# Altium PCB test.PcbDoc
Units mm, origin at the board's own origin, x right, y up, seen from the top; angles counter-clockwise.
Board outline 81.15 x 81.79 mm, 2 copper layers (Top Layer, Bottom Layer); 14 components, 10 nets, 66 pads, 1 vias.
Unrouted connection lines stored in the file: 1.
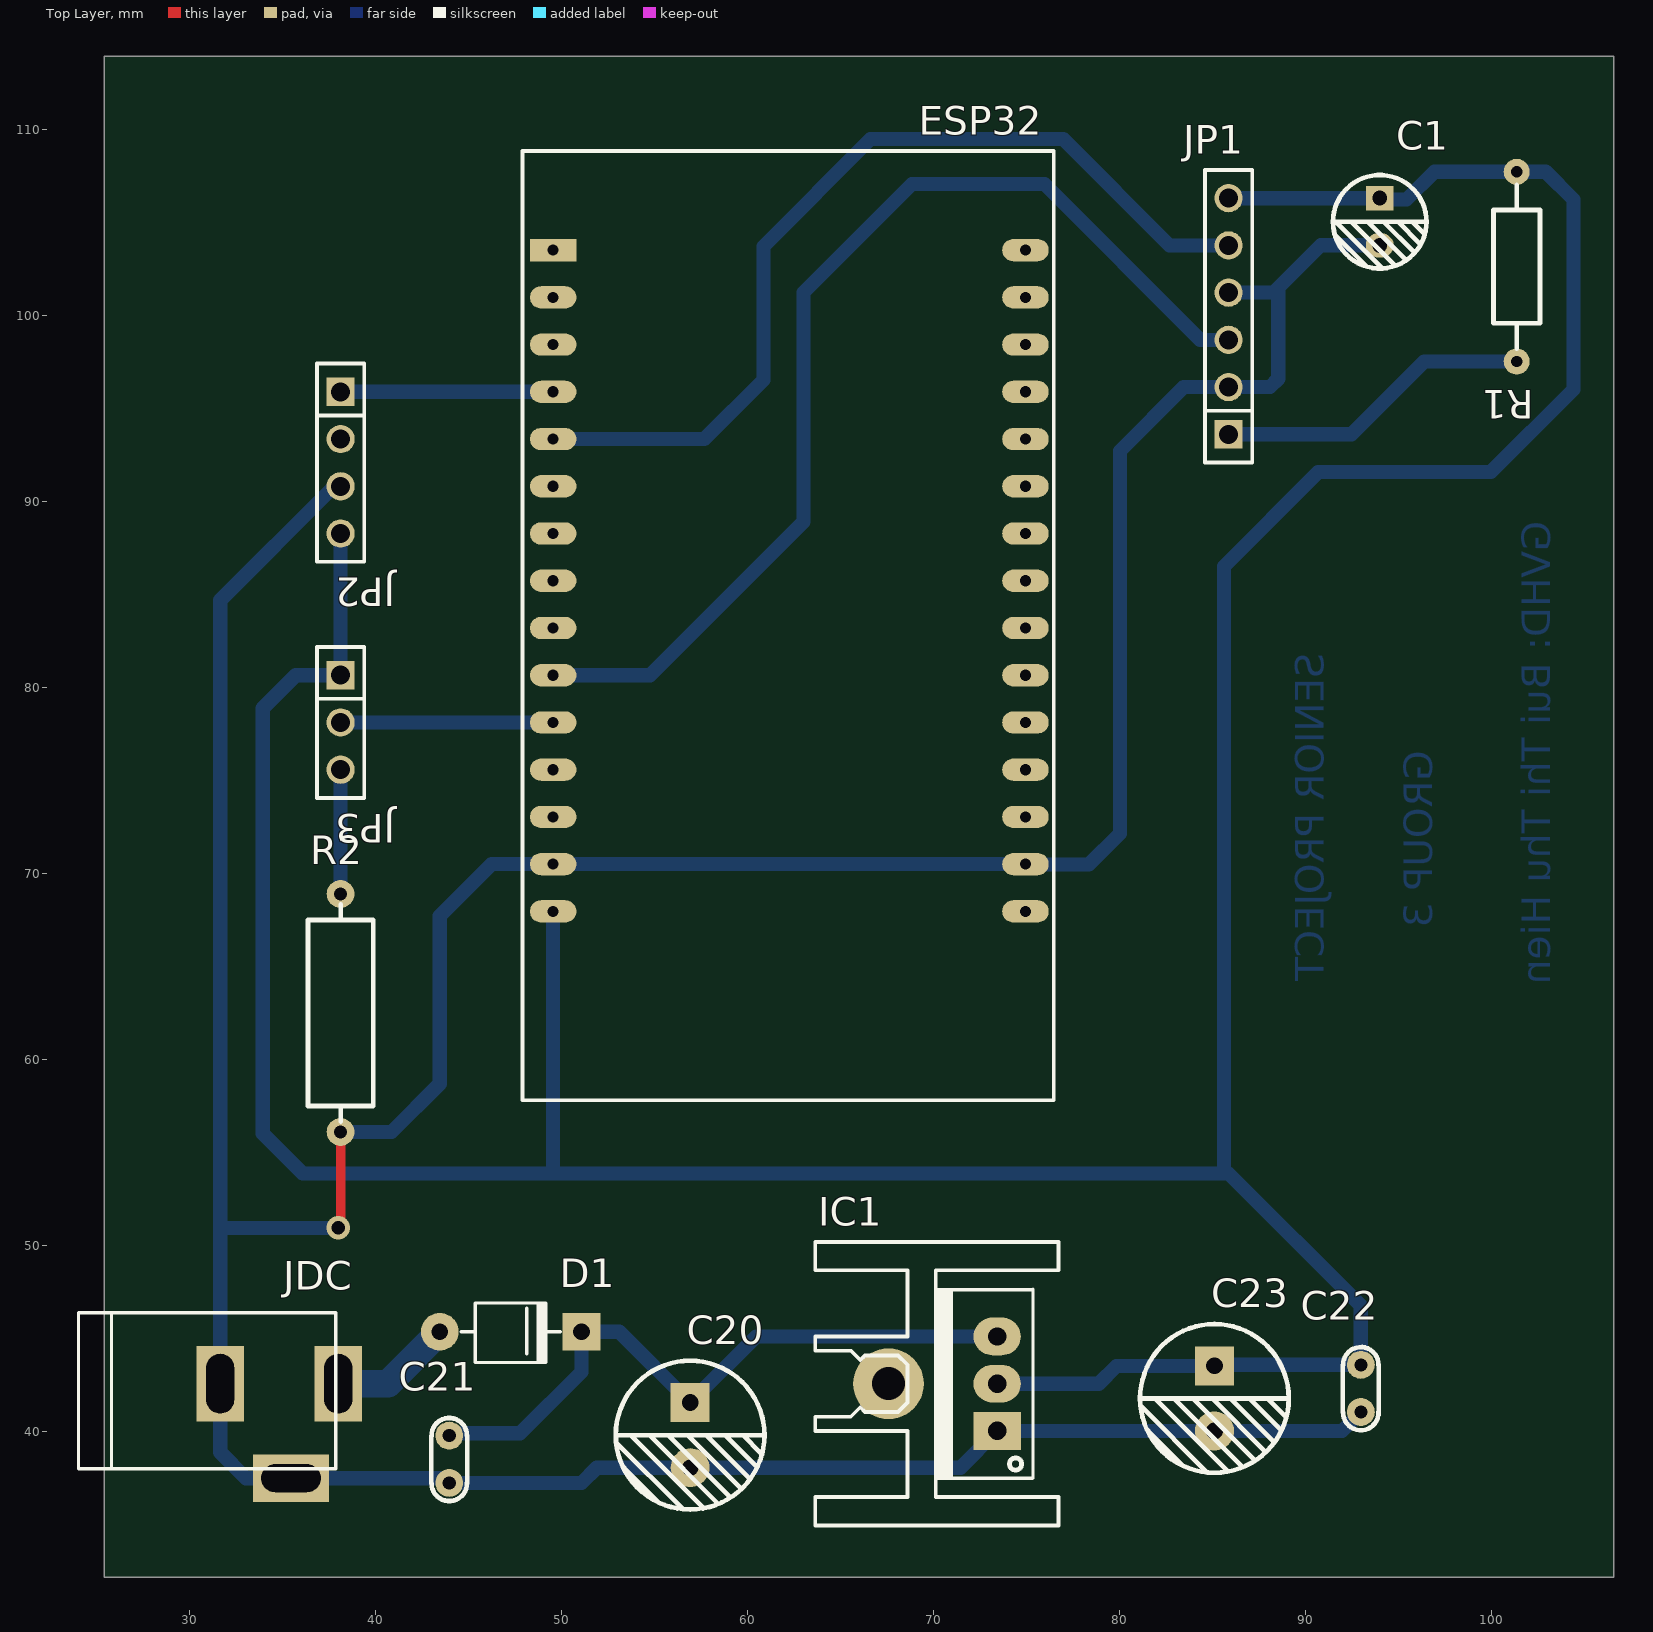
[diagram p0: Top Layer view]
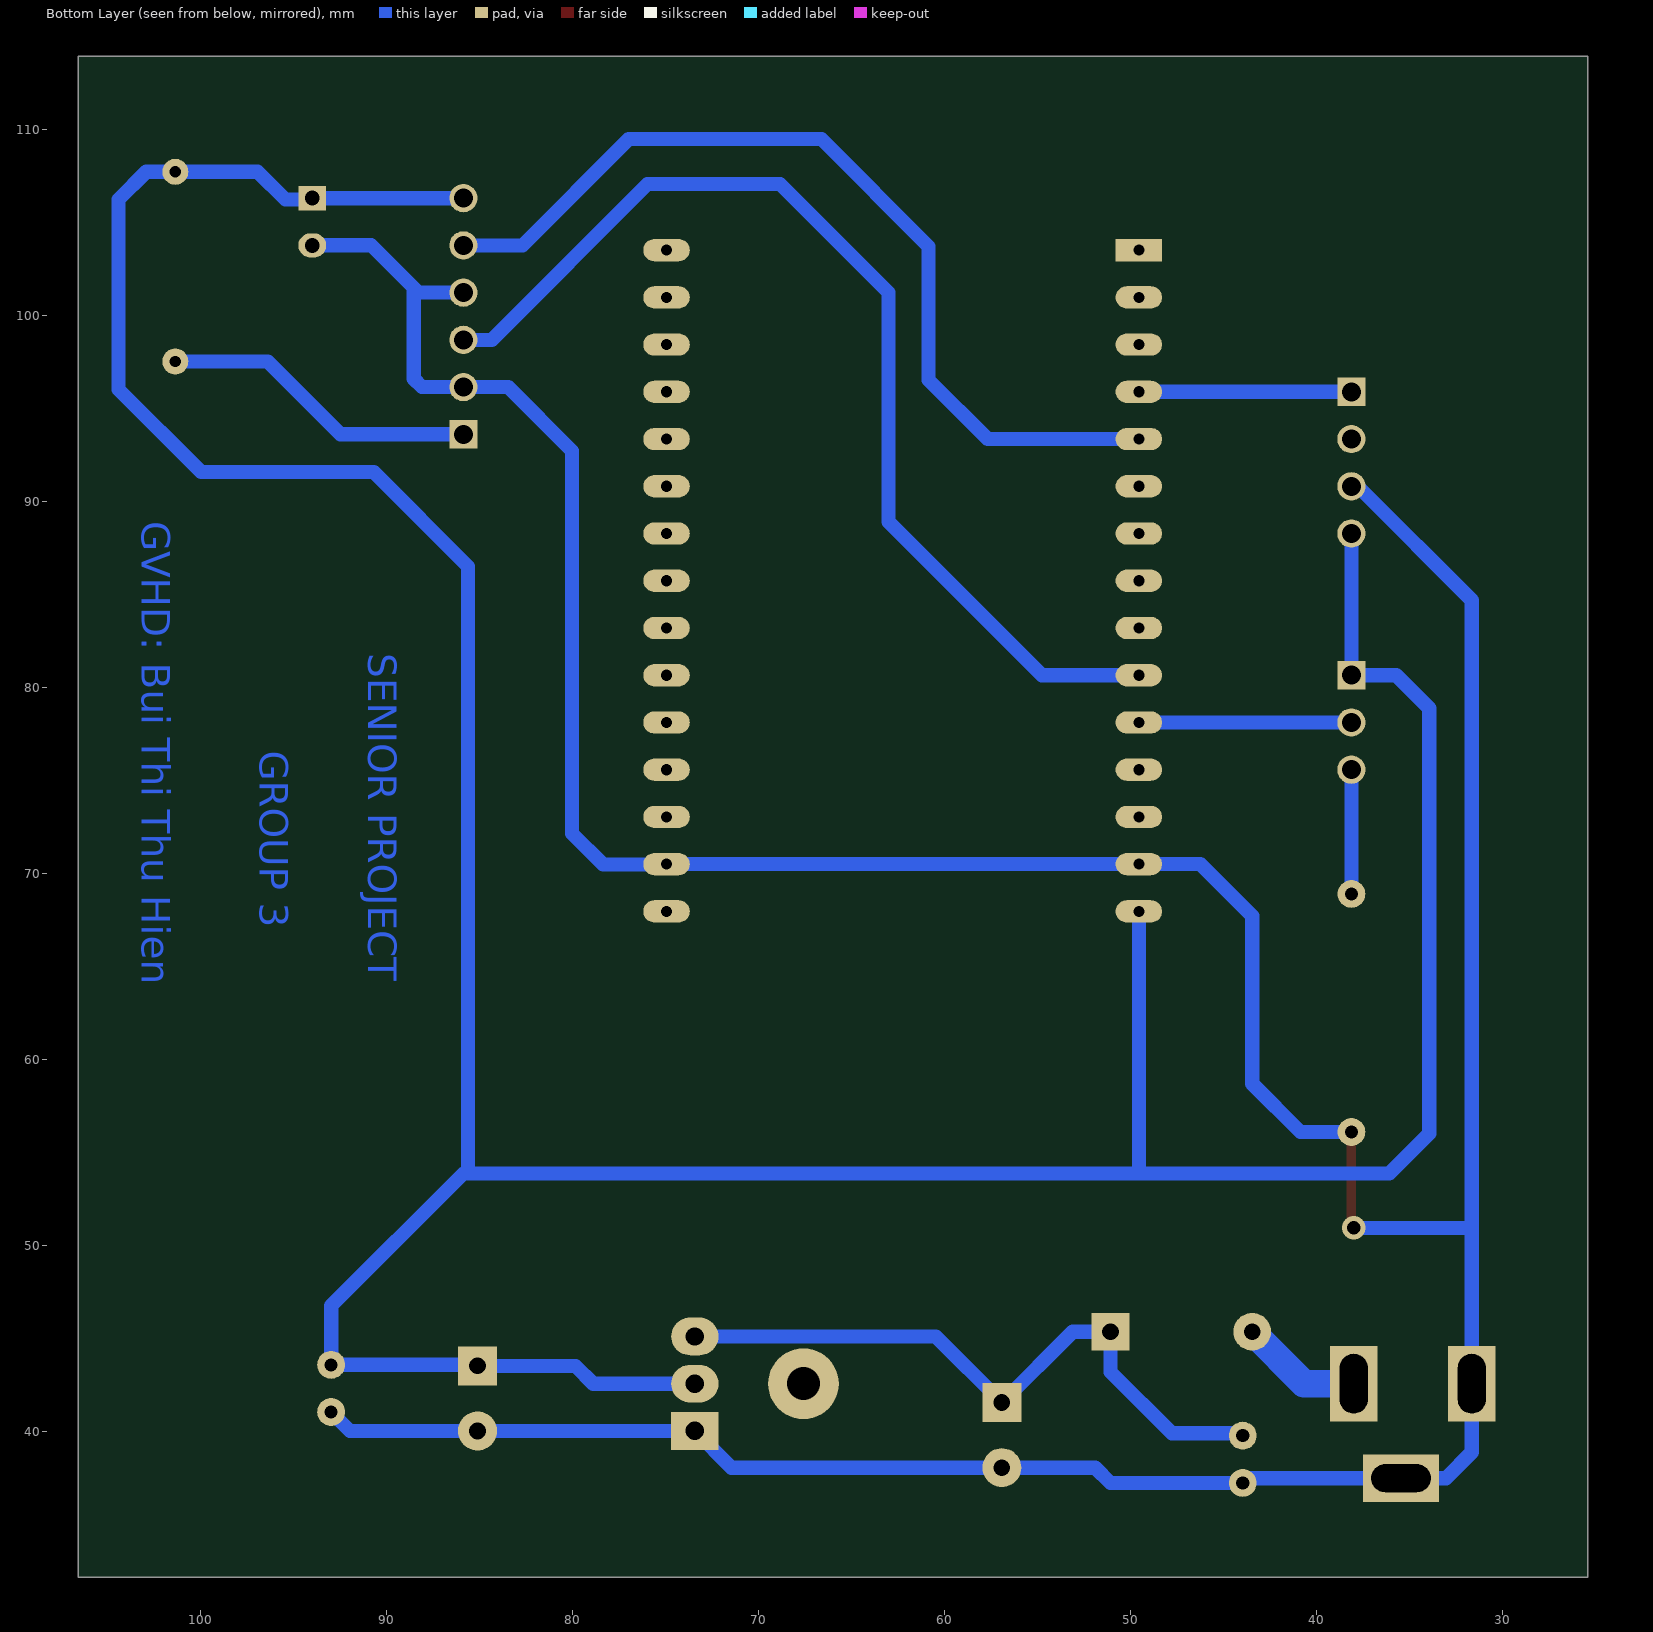
[diagram p1: Bottom Layer view, seen from below]
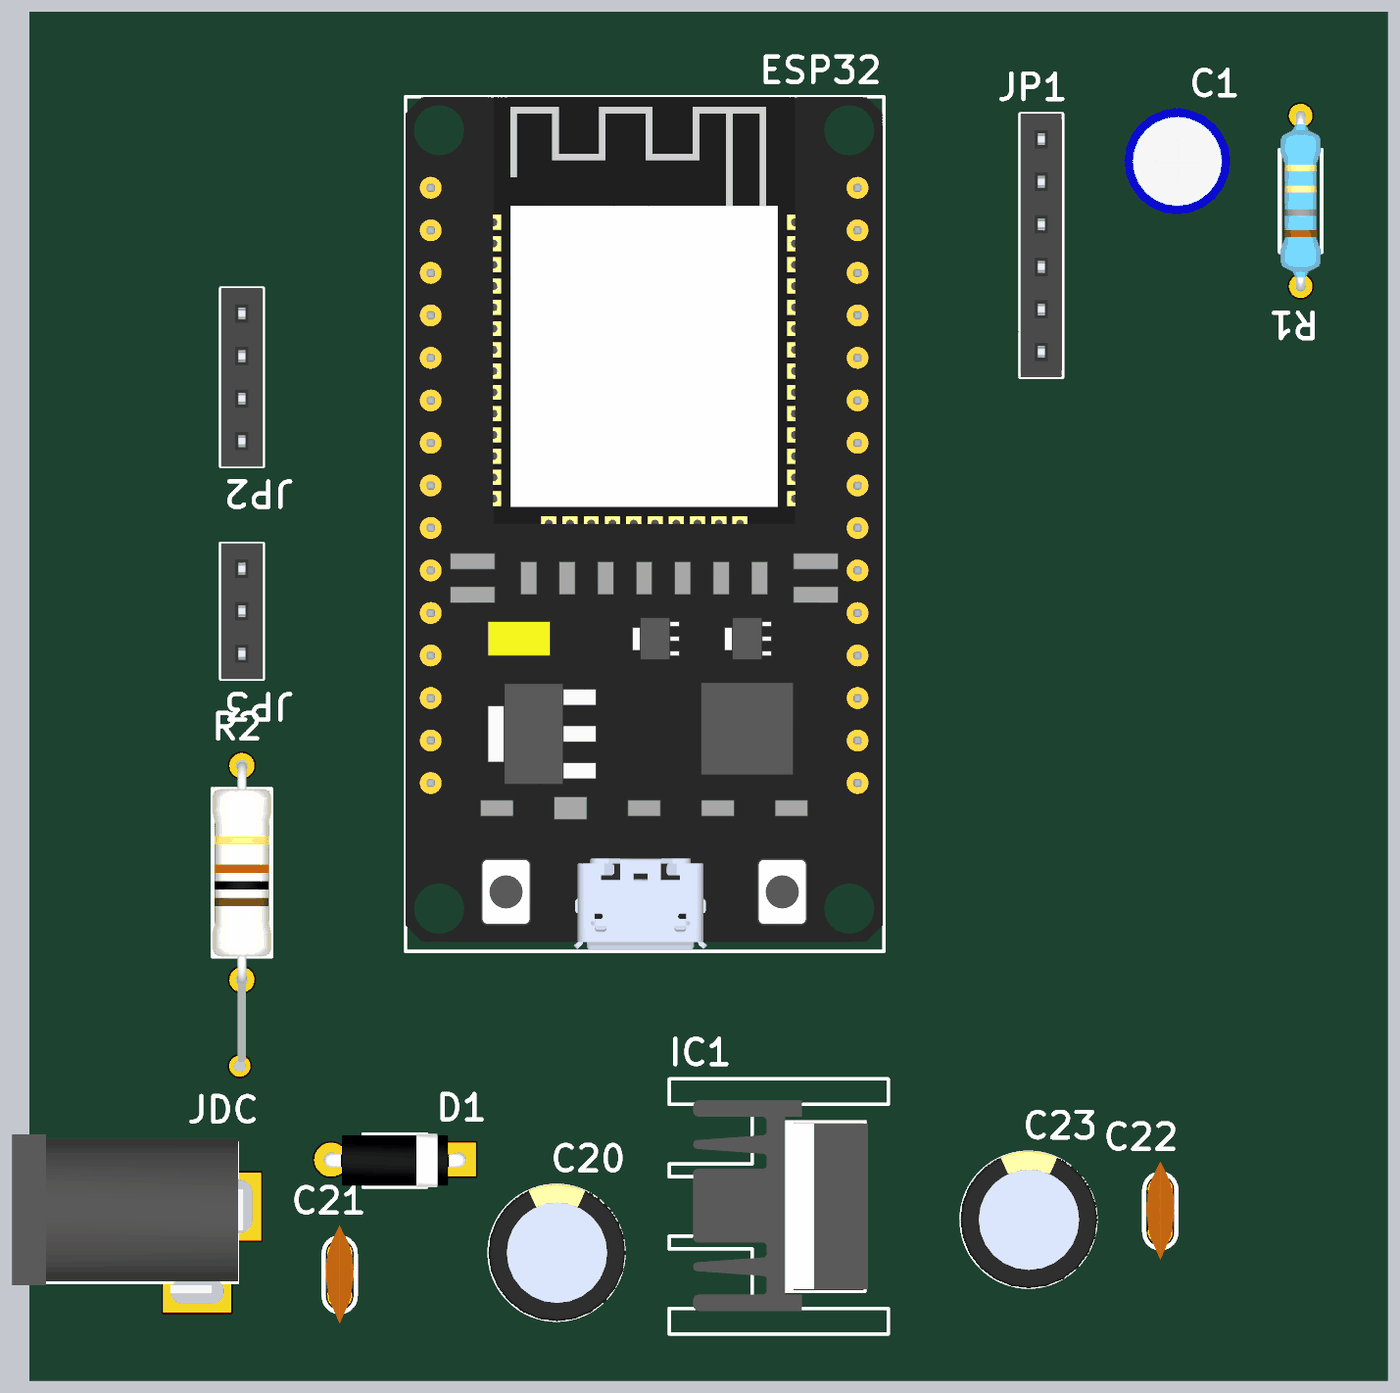
[diagram p2: 3D render of the assembled board from above, using the file's embedded part models]

## Layer stack, top to bottom
Top Solder: solder mask 0.0102, Solder Resist, Dk 3.5
Top Layer: signal copper 0.0356
Dielectric 1: dielectric 0.32, FR-4, Dk 4.8
Bottom Layer: signal copper 0.0356
Bottom Solder: solder mask 0.0102, Solder Resist, Dk 3.5

## Board outline
25.4,32.131 106.553,32.131 106.553,113.919 25.4,113.919

## Design rules (kind name [scope] priority, off if disabled: settings)
Clearance [All] p1: gap=0.9 ignorepadtopadclearanceinfootprint=FALSE
PolygonConnect [All] p1: connectstyle=Relief reliefconductorwidth=0.254 reliefentries=4 polygonreliefangle="90 Angle" airgapwidth=0.254
RoutingLayers [All] p1: top layer_v5=FALSE bottom layer_v5=TRUE
RoutingVias [All] p1: holewidth=0.711 width=1.27 viastyle="Through Hole" minholewidth=0.711 minwidth=1.27 maxholewidth=0.711 maxwidth=1.27
SolderMaskExpansion [All] p1: expansion=0.102 istentingtop=FALSE
Width [All] p1: maxlimit=1.5 minlimit=0.711 preferedwidth=0.762
29 further rules are at their usual default settings.

## Classes and differential pairs
net class ESP32_Nets: +5 DHT11 GND ledPM MQ135 NetESP32_1 NetESP32_2 NetESP32_3 NetESP32_6 NetESP32_7 NetESP32_8 NetESP32_9 NetESP32_12 NetESP32_13 NetESP32_16 NetESP32_18 NetESP32_19 NetESP32_20 NetESP32_21 NetESP32_22 NetESP32_23 NetESP32_24 NetESP32_25 NetESP32_26 NetESP32_27 NetESP32_28 NetESP32_29 NetESP32_30 PM2.5
net class R2_Nets: GND NetJP3_3
net class JP2_Nets: +5 GND MQ135 NetESP32_1 NetESP32_2 NetESP32_4 NetESP32_6 NetESP32_7 NetESP32_8 NetESP32_9 NetESP32_12 NetESP32_13 NetESP32_16 NetESP32_18 NetESP32_19 NetESP32_20 NetESP32_21 NetESP32_22 NetESP32_23 NetESP32_24 NetESP32_25 NetESP32_26 NetESP32_27 NetESP32_28 NetESP32_29 NetESP32_30
net class R1_Nets: +5 NetJP1_1
net class JP3_Nets: +5 DHT11 NetJP3_3
net class JP1_Nets: +5 GND ledPM NetJP1_1 PM2.5
net class JDC_Nets: +12 GND
net class IC1_Nets: +5 GND NetC20_1
net class D1_Nets: +12 NetC20_1
net class C23_Nets: +5 GND
net class C22_Nets: +5 GND
net class C21_Nets: GND NetC20_1
net class C20_Nets: GND NetC20_1
net class C1_Nets: +5 GND

## Components (designator, comment, footprint, x,y, rotation, side; value= is the part's Value field where it differs from the comment)
C1 "220uF" "Tu hoa 5mm" 93.98,105.029 r270 top
C20 "25v 220uF" "Tu hoa 8mm" 56.896,39.779 r270 top
C21 "104" "tu gom" 43.942,38.481 r90 top
C22 "104" "tu gom" 92.964,42.291 r90 top
C23 "16v 470uF" "tu hoa 8mm" 85.09,41.755 r270 top
D1 "100v" "DIODE 1A" 42.164,45.339 r180 top
ESP32 "ESP32 30PIN" "ESP32 WROOM 32 KIT" 49.53,103.505 r0 top
IC1 "LM7805" TO220H1 73.406,42.545 r90 top
JDC "JACK DC 5.5" "JACK DC 5.5" 34.798,40.005 r0 top value="Jac DC"
JP1 "PM2.5" "JP 1x6 CT" 85.852,93.599 r90 top
JP2 "MQ135" "JP 1x4 CT" 38.1,95.885 r270 top
JP3 "DHT11" "JP 1x3 CT" 38.1,80.645 r270 top
R1 "100" "tro vach 1/4w" 101.346,102.616 r270 top
R2 "100R" "tro vach 1/2w" 38.1,62.484 r90 top

## Footprints (in the part's own frame and the unit in brackets; to place one, negate y for a bottom-side part, rotate by r counter-clockwise, add the part's x,y. Pads: shape width x height; smd on the part's side, far side on the other; paste and mask are expansions set on the pad)
"DIODE 1A" [mil] "Diode 1A"
  round 80 hole 35: 1(-50,0)
  rect 80x80 hole 35: 2(-350,0)
  silkscreen extent -305,-61 -95,65, body extent -366,-61 -34,65, height 122
"ESP32 WROOM 32 KIT" [mm]
  rect 2.5x1.2 hole 0.6: 1(0,0)
  oval 2.5x1.2 hole 0.6: 2(0,-2.54) 3(0,-5.08) 4(0,-7.62) 5(0,-10.16) 6(0,-12.7) 7(0,-15.24) 8(0,-17.78) 9(0,-20.32) 10(0,-22.86) 11(0,-25.4) 12(0,-27.94) 13(0,-30.48) 14(0,-33.02) 15(0,-35.56) 16(25.4,-35.56) 17(25.4,-33.02) 18(25.4,-30.48) 19(25.4,-27.94) 20(25.4,-25.4) 21(25.4,-22.86) 22(25.4,-20.32) 23(25.4,-17.78) 24(25.4,-15.24) 25(25.4,-12.7) 26(25.4,-10.16) 27(25.4,-7.62) 28(25.4,-5.08) 29(25.4,-2.54) 30(25.4,0)
  silkscreen extent -1.65,-45.72 26.92,5.33, body extent -1.65,-45.6 26.85,5.33, height 10.49
"JACK DC 5.5" [mm] "Jac DC input"
  rect 2.54x4.064 hole 1.5 slot 3.2 at 90 deg: 1(3.175,2.54) 2(-3.175,2.54)
  rect 4.064x2.54 hole 1.5 slot 3.2 at 0 deg: 3(0.635,-2.54)
  silkscreen extent -10.79,-2.03 3.05,6.35, body extent -10.42,-2.67 3.4,6.84, height 11.02
"JP 1x3 CT" [mm]
  rect 1.52x1.52 hole 1.02: 1(0,0)
  round 1.52 hole 1.02: 2(2.54,0) 3(5.08,0)
  silkscreen extent -1.52,-1.27 6.6,1.27, body extent -1.52,-1.25 6.6,1.25, height 8.51
"JP 1x4 CT" [mm]
  rect 1.52x1.52 hole 1.02: 1(0,0)
  round 1.52 hole 1.02: 2(2.54,0) 3(5.08,0) 4(7.62,0)
  silkscreen extent -1.52,-1.27 9.14,1.27, body extent -1.52,-1.25 9.14,1.25, height 8.51
"JP 1x6 CT" [mm] "6 row, straight, gold plating"
  rect 1.52x1.52 hole 1.02: 1(0,0)
  round 1.52 hole 1.02: 2(2.54,0) 3(5.08,0) 4(7.62,0) 5(10.16,0) 6(12.7,0)
  silkscreen extent -1.52,-1.27 14.22,1.27, body extent -1.52,-1.25 14.22,1.25, height 8.51
TO220H1 [mil] "TO-220 - 1-2-3"
  round 150 hole 70: 0(0,230)
  rect 80x100 hole 39: 1(-100,0)
  oval 80x100 hole 39: 2(0,0) 3(100,0)
  silkscreen extent -300,-130 300,385, body extent -246,-82 250,329, height 1000
"tro vach 1/2w" [mm]
  round 1.5 hole 0.7: 1(-6.4,0) 2(6.4,0)
  silkscreen extent -5.84,-1.75 5.84,1.75, body extent -6.62,-1.75 6.62,1.75, height 3.5
"tro vach 1/4w" [mm]
  round 1.4 hole 0.6: 1(-5.1,0) 2(5.1,0)
  silkscreen extent -4.39,-1.25 4.42,1.25, body extent -5.38,-1.2 5.38,1.2, height 2.41
"tu gom" [mm] "Tu gom mini"
  round 1.5 hole 0.7: 1(-1.27,0) 2(1.27,0)
  silkscreen extent -2.25,-0.97 2.22,0.97, body extent -2.92,-0.85 2.92,0.85, height 6.12
"Tu hoa 5mm" [mm]
  rect 1.3x1.5 hole 0.8: 1(-1.27,0)
  oval 1.3x1.5 hole 0.8: 2(1.27,0)
  silkscreen extent -2.51,-2.51 2.51,2.51, body extent -3.12,-3.18 3.23,3.18, height 14.55
"Tu hoa 8mm" [mm]
  rect 2.1x2.1 hole 0.9: 1(-1.75,0)
  round 2.1 hole 0.9: 2(1.75,0)
  silkscreen extent -4,-4 4,4, body extent -4.1,-4.07 4.1,4.13, height 13.81
"tu hoa 8mm" [mm]
  rect 2.1x2.1 hole 0.9: 1(-1.75,0)
  round 2.1 hole 0.9: 2(1.75,0)
  silkscreen extent -4,-4 4,4, body extent -4.1,-4.07 4.1,4.13, height 13.81

## Part data
C1: library part "Tu Hoa 220uF 16V 6x11", "Cắm", Chung_Loai=Cắm, Don_Vi=Con, Ma_Hang=MH001348, So_Chan=2, Ten_Linh_Kien="Tụ Hóa 220uF 16V 6x11MM"
C20: library part "Tu Hoa 220uF 25V 8x10", "Cắm", Chung_Loai=Cắm, Don_Vi=Con, Ma_Hang=MH006864, So_Chan=2, Ten_Linh_Kien="Tụ Hóa 220uF 25V 8x10MM"
C21 C22: library part "Tu gom 104 50V", "Cắm", Chung_Loai=Cắm, Don_Vi=Con, Ma_Hang=MH004761, So_Chan=2, Ten_Linh_Kien="Tụ gốm 104 100nF 50V"
C23: library part "Tu Hoa 470uF 16V 8x11", "Cắm", Chung_Loai=Cắm, Don_Vi=Con, Ma_Hang=MH006550, So_Chan=2, Ten_Linh_Kien="Tụ Hóa 470uF 16V 8x11MM"
D1: library part "Diode 1N4007", "Cắm", Chung_Loai=Cắm, Don_Vi=Con, Ma_Hang=MH001063, Ten_Linh_Kien="Diode 1N4007 1A (DIP)"
ESP32: library part "ESP32 WROOM 32 KIT"
IC1: library part "LM317 TO220", "Cắm", Chung_Loai=Cắm, Don_Vi=Con, Ma_Hang=MH003115, Ten_Linh_Kien="LM317T TO220 REG LDO ADJ 1.5A"
JP1: library part "JP 1x6 2.54 Cai Thang", "Cắm", Chung_Loai=Cắm, Don_Vi=Con, Ma_Hang=MH004006, Ten_Linh_Kien="Jump Đơn Cái 2.54MM 1x20P Thẳng"
JP2: library part "JP 1x4 2.54 Cai Thang", "Cắm", Chung_Loai=Cắm, Don_Vi=Con, Ma_Hang=MH004006, Ten_Linh_Kien="Jump Đơn Cái 2.54MM 1x20P Thẳng"
JP3: library part "JP 1x3 2.54 Cai Thang", "Cắm", Chung_Loai=Cắm, Don_Vi=Con, Ma_Hang=MH004006, Ten_Linh_Kien="Jump Đơn Cái 2.54MM 1x20P Thẳng"
R1: library part "Tro Vach 1/4W 5% 68k", "Cắm", Chung_Loai=Cắm, Don_Vi=Con, Ma_Hang=MH007332, So_Chan=2, Ten_Linh_Kien="Trở Vạch 1/4w 5% 68k"
R2: library part "Tro Vach 1/2W 5% 100R", "Cắm", Chung_Loai=Cắm, Don_Vi=Con, Ma_Hang=MH007106, So_Chan=2, Ten_Linh_Kien="Trở 5% 1/2w 100R"

## Via types
v1: diameter 1.27, hole 0.711, Top Layer to Bottom Layer, 1 vias

## Nets (pads, with @x,y where several pads share a name; then routed paths per layer and width w, separated by ;. In a path a pad name is that pad's centre, name@x,y a point inside that pad or via, vN(x,y) a via of type N, cw(c..) or ccw(c..) an arc to the next point about the centre after c; other vN are vias at no path point)
+5: C1.1 C22.2 C23.1 ESP32.15 IC1.2 JP1.6 JP2.4 JP3.1 R1.1 | length 221.2
  Bottom Layer w0.762: JP2.4 JP3.1 35.687,80.645 33.909,78.867 33.909,56.007 36.068,53.848 49.53,53.848 ; ESP32.15 49.53,53.848 ; IC1.2 78.867,42.545 79.827,43.505 C23.1 85.09,43.561 C22.2 92.964,46.736 85.852,53.848 49.53,53.848 ; 85.598,53.848 85.598,86.487 90.678,91.567 99.949,91.567 104.394,96.012 104.394,106.234 102.912,107.716 R1.1 96.921,107.716 95.427,106.222 93.803,106.222 C1.1@93.726,106.299 ; JP1.6 C1.1
+12: D1.1 JDC.1 | length 6.6
  Bottom Layer w1.5: JDC.1 40.64,42.545 D1.1
DHT11: ESP32.11 JP3.2 | length 11.4
  Bottom Layer w0.762: JP3.2 ESP32.11
GND: C1.2 C20.2 C21.1 C22.1 C23.2 ESP32.14 ESP32.17 IC1.1 JDC.2 JDC.3 JP1.2 JP1.4 JP2.3 R2.1 | length 223.3
  Bottom Layer w0.762: v1(37.973,50.927) 31.623,50.927 ; R2.1 40.844,56.084 43.434,58.674 43.434,67.691 46.228,70.485 ESP32.14 ESP32.17 74.956,70.459 78.333,70.459 80.01,72.136 80.01,92.71 83.439,96.139 JP1.2 88.073,96.139 88.519,96.585 88.519,101.219 ; JP2.3 37.955,90.66 37.609,90.66 31.623,84.674 31.623,50.927 ; JP1.4 88.2,101.219 ; 88.265,101.219 90.818,103.772 93.967,103.772 C1.2 ; C22.1@93.164,41.021 C22.1 91.948,40.005 C23.2 IC1.1 71.43,38.029 51.872,38.029 51.054,37.211 43.742,37.211 43.488,37.465 JDC.3 33.02,37.465 31.623,38.862 JDC.2 31.623,50.927
ledPM: ESP32.10 JP1.3 | length 58
  Bottom Layer w0.762: ESP32.10 54.737,80.645 62.992,88.9 62.992,101.219 68.834,107.061 75.946,107.061 84.328,98.679 JP1.3
MQ135: ESP32.4 JP2.1 | length 11.4
  Bottom Layer w0.762: JP2.1 ESP32.4
NetC20_1: C20.1 C21.2 D1.2 IC1.3 | length 36.1
  Bottom Layer w0.762: C21.2 44.069,39.878 47.752,39.878 51.054,43.18 D1.2 53.086,45.339 C20.1 60.452,45.085 IC1.3
NetJP1_1: JP1.1 R1.2 | length 17.1
  Bottom Layer w0.762: JP1.1 92.456,93.599 96.373,97.516 R1.2
NetJP3_3: JP3.3 R2.2 | length 6.7
  Bottom Layer w0.762: R2.2 JP3.3
PM2.5: ESP32.5 JP1.5 | length 49.6
  Bottom Layer w0.762: ESP32.5 57.658,93.345 60.833,96.52 60.833,103.708 66.599,109.474 76.962,109.474 82.677,103.759 JP1.5
pads on no net: ESP32.1 ESP32.2 ESP32.3 ESP32.6 ESP32.7 ESP32.8 ESP32.9 ESP32.12 ESP32.13 ESP32.16 ESP32.18 ESP32.19 ESP32.20 ESP32.21 ESP32.22 ESP32.23 ESP32.24 ESP32.25 ESP32.26 ESP32.27 ESP32.28 ESP32.29 ESP32.30 IC1.0 JP2.2
copper on no net: | length 4.6
  Top Layer w0.5: 38.1,51.435 38.1,56.084

## Other copper
Bottom Layer:
  text "GVHD: Bui Thi Thu Hien" at 103.149,88.925 h1.52 r90
  text "SENIOR PROJECT" at 90.957,81.813 h1.52 r90
  text "GROUP 3" at 96.799,76.579 h1.52 r90